# Altium PCB Smart_Watch.PcbDoc
Units mm, origin at the board's own origin, x right, y up, seen from the top; angles counter-clockwise.
Board outline 44 x 44 mm, 4 copper layers (Top Layer, Layer 1, Layer 2, Bottom Layer), stack 0.603 mm thick; 46 components, 48 nets, 221 pads, 80 vias.
Unrouted connection lines stored in the file: 80.
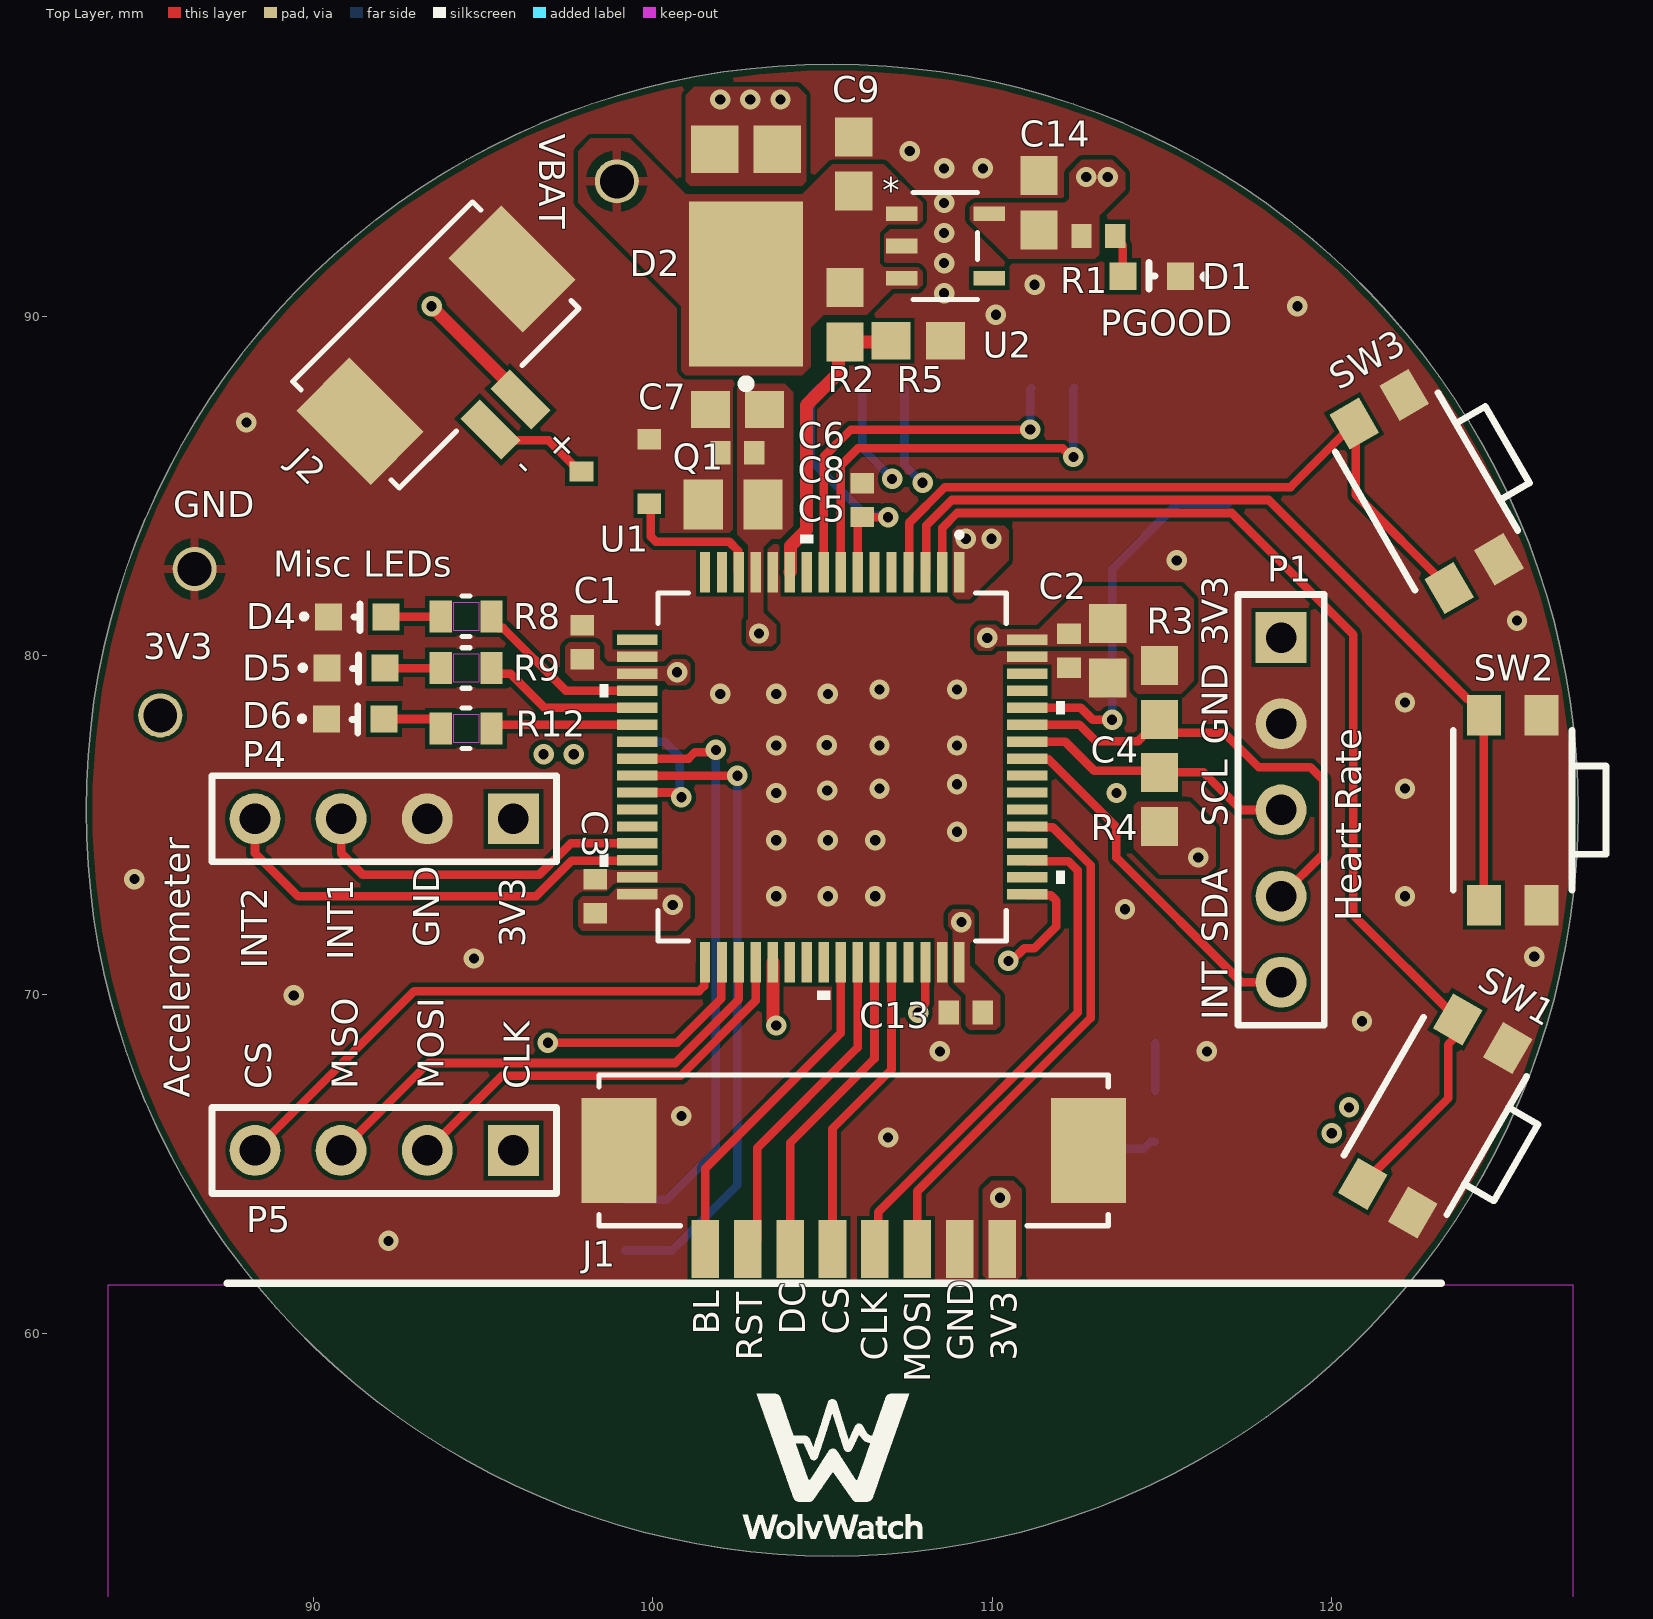
[diagram p0: Top Layer view]
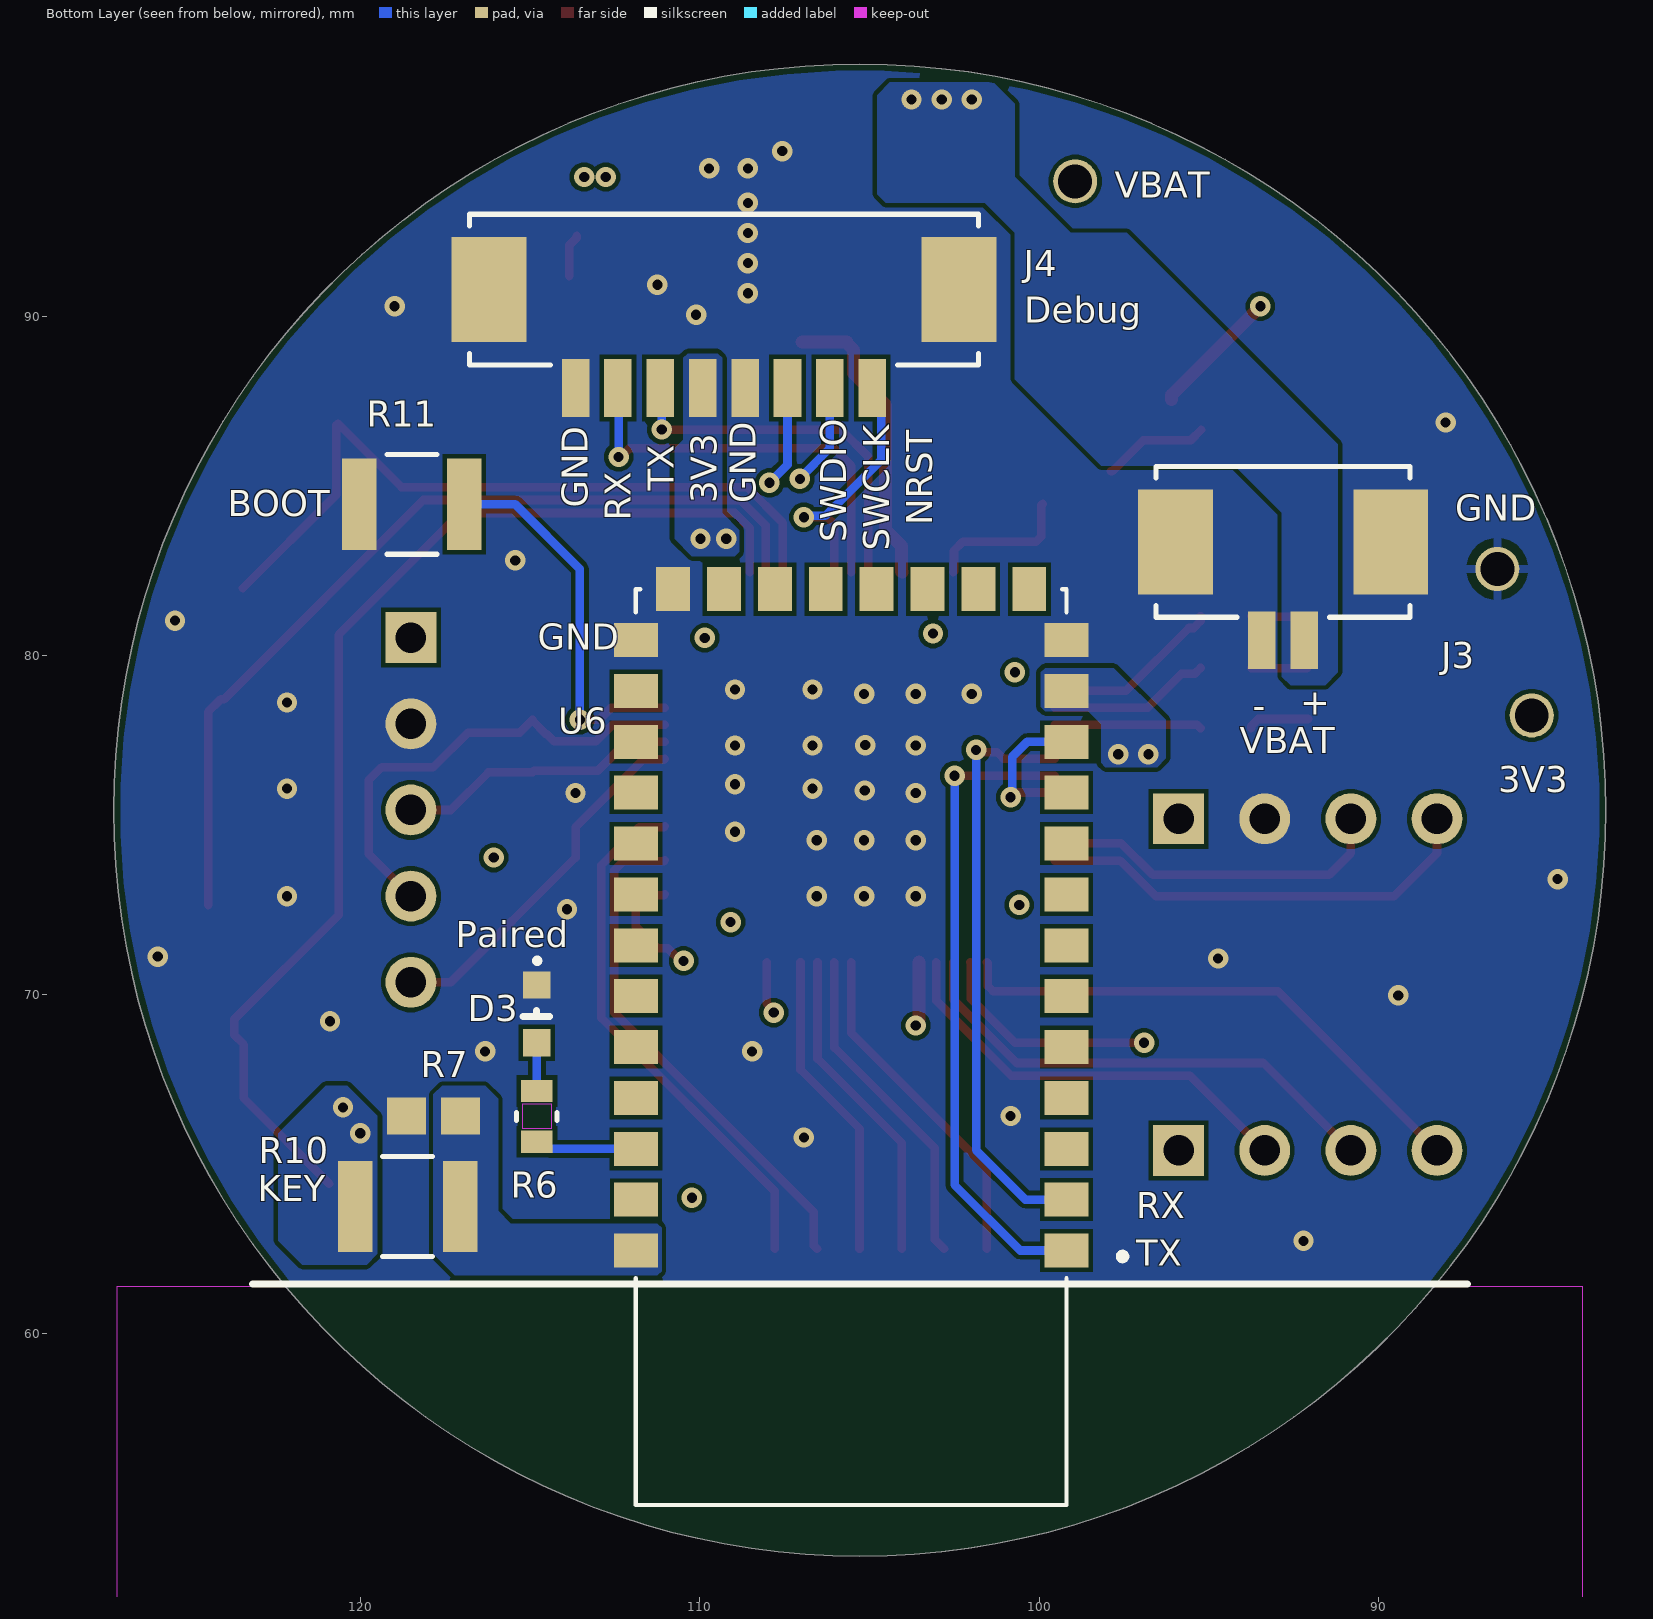
[diagram p1: Bottom Layer view, seen from below]
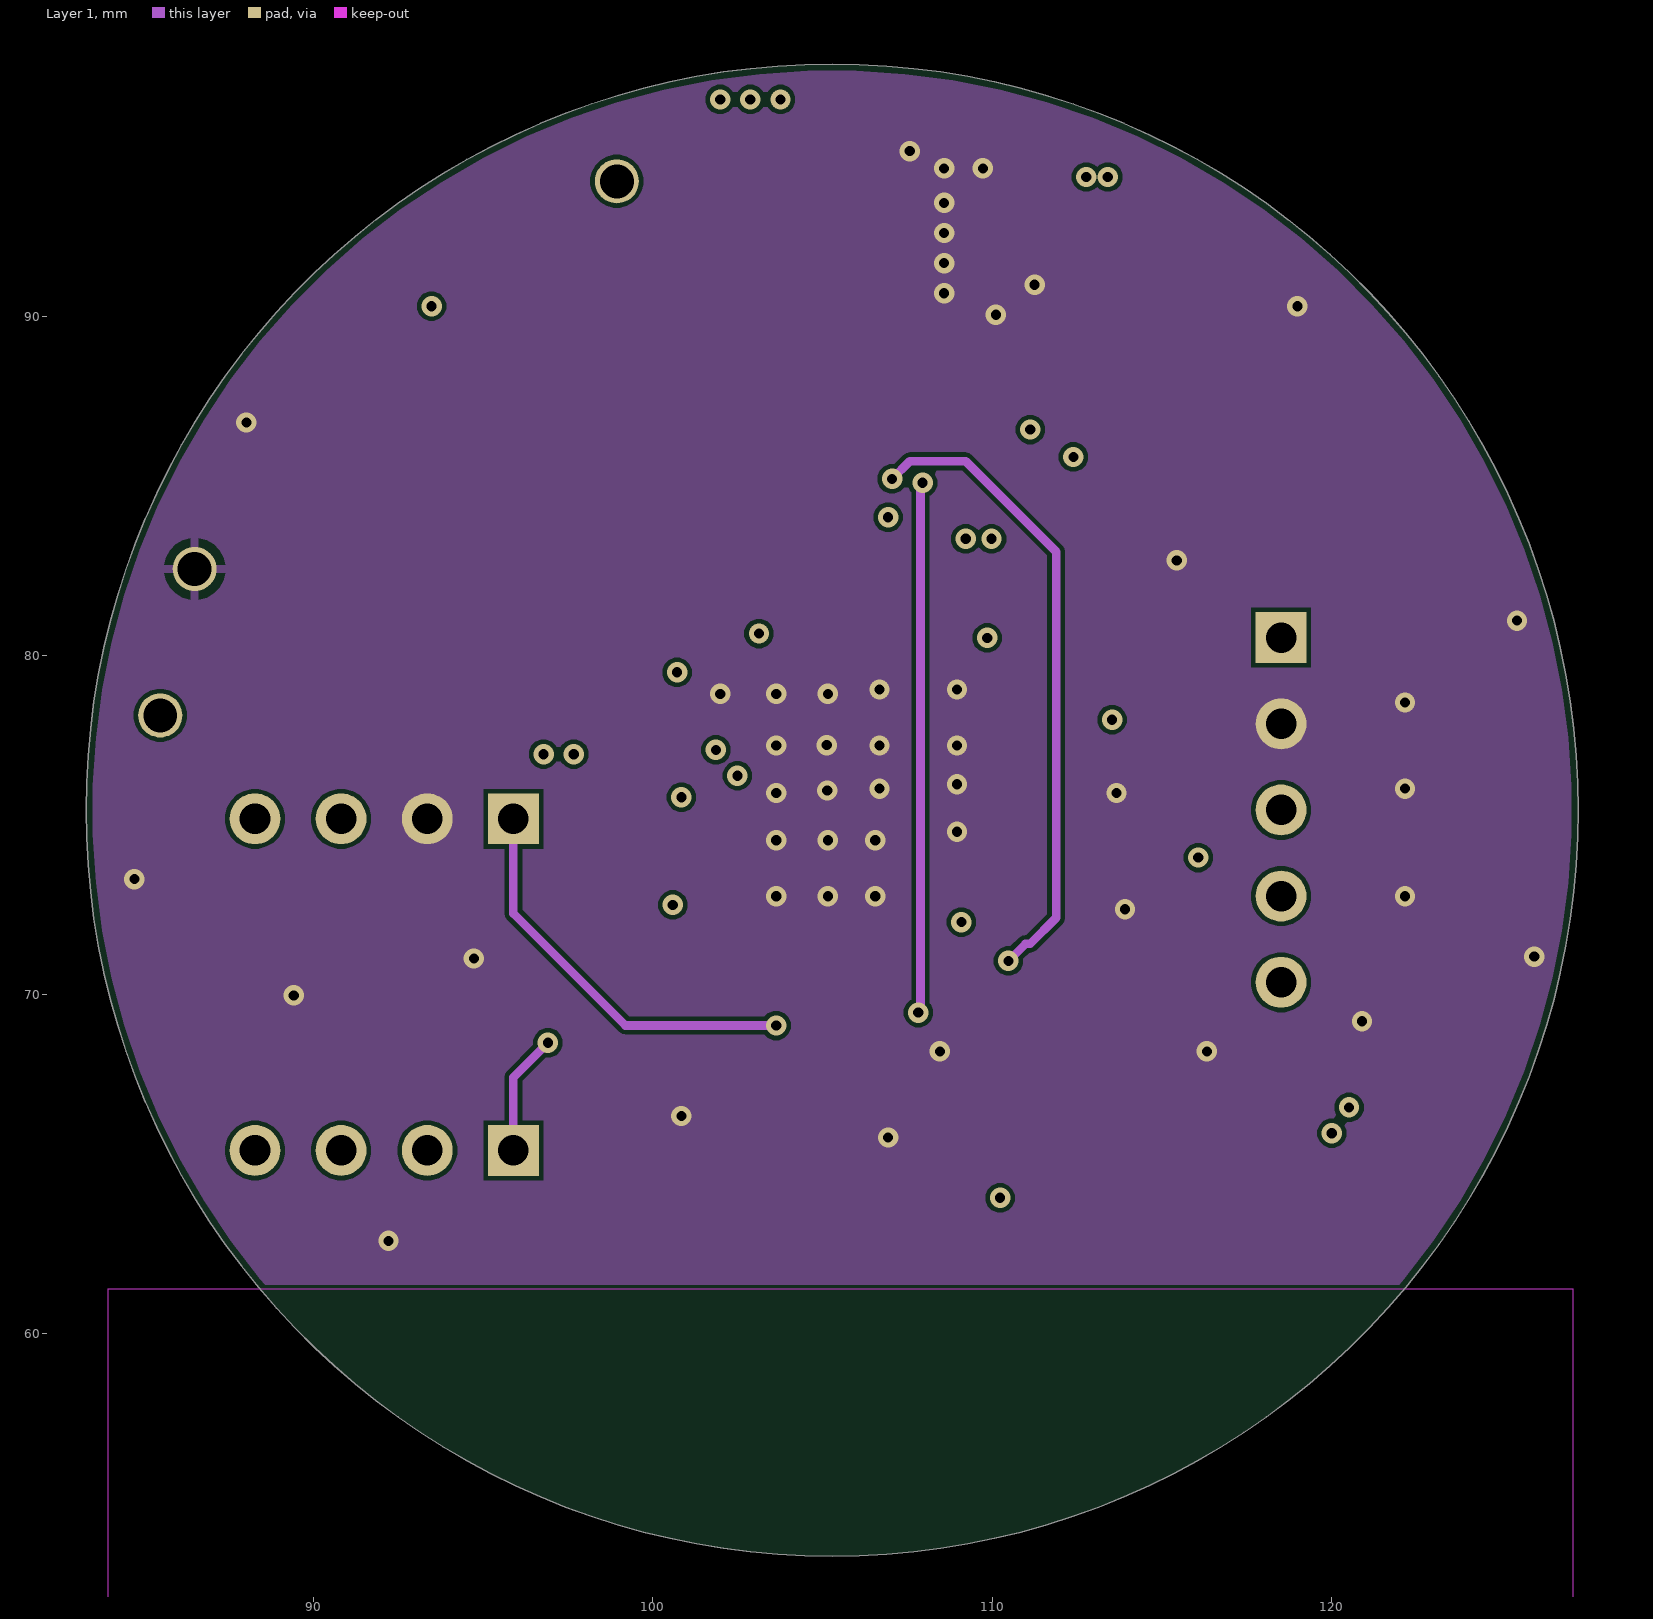
[diagram p2: Layer 1]
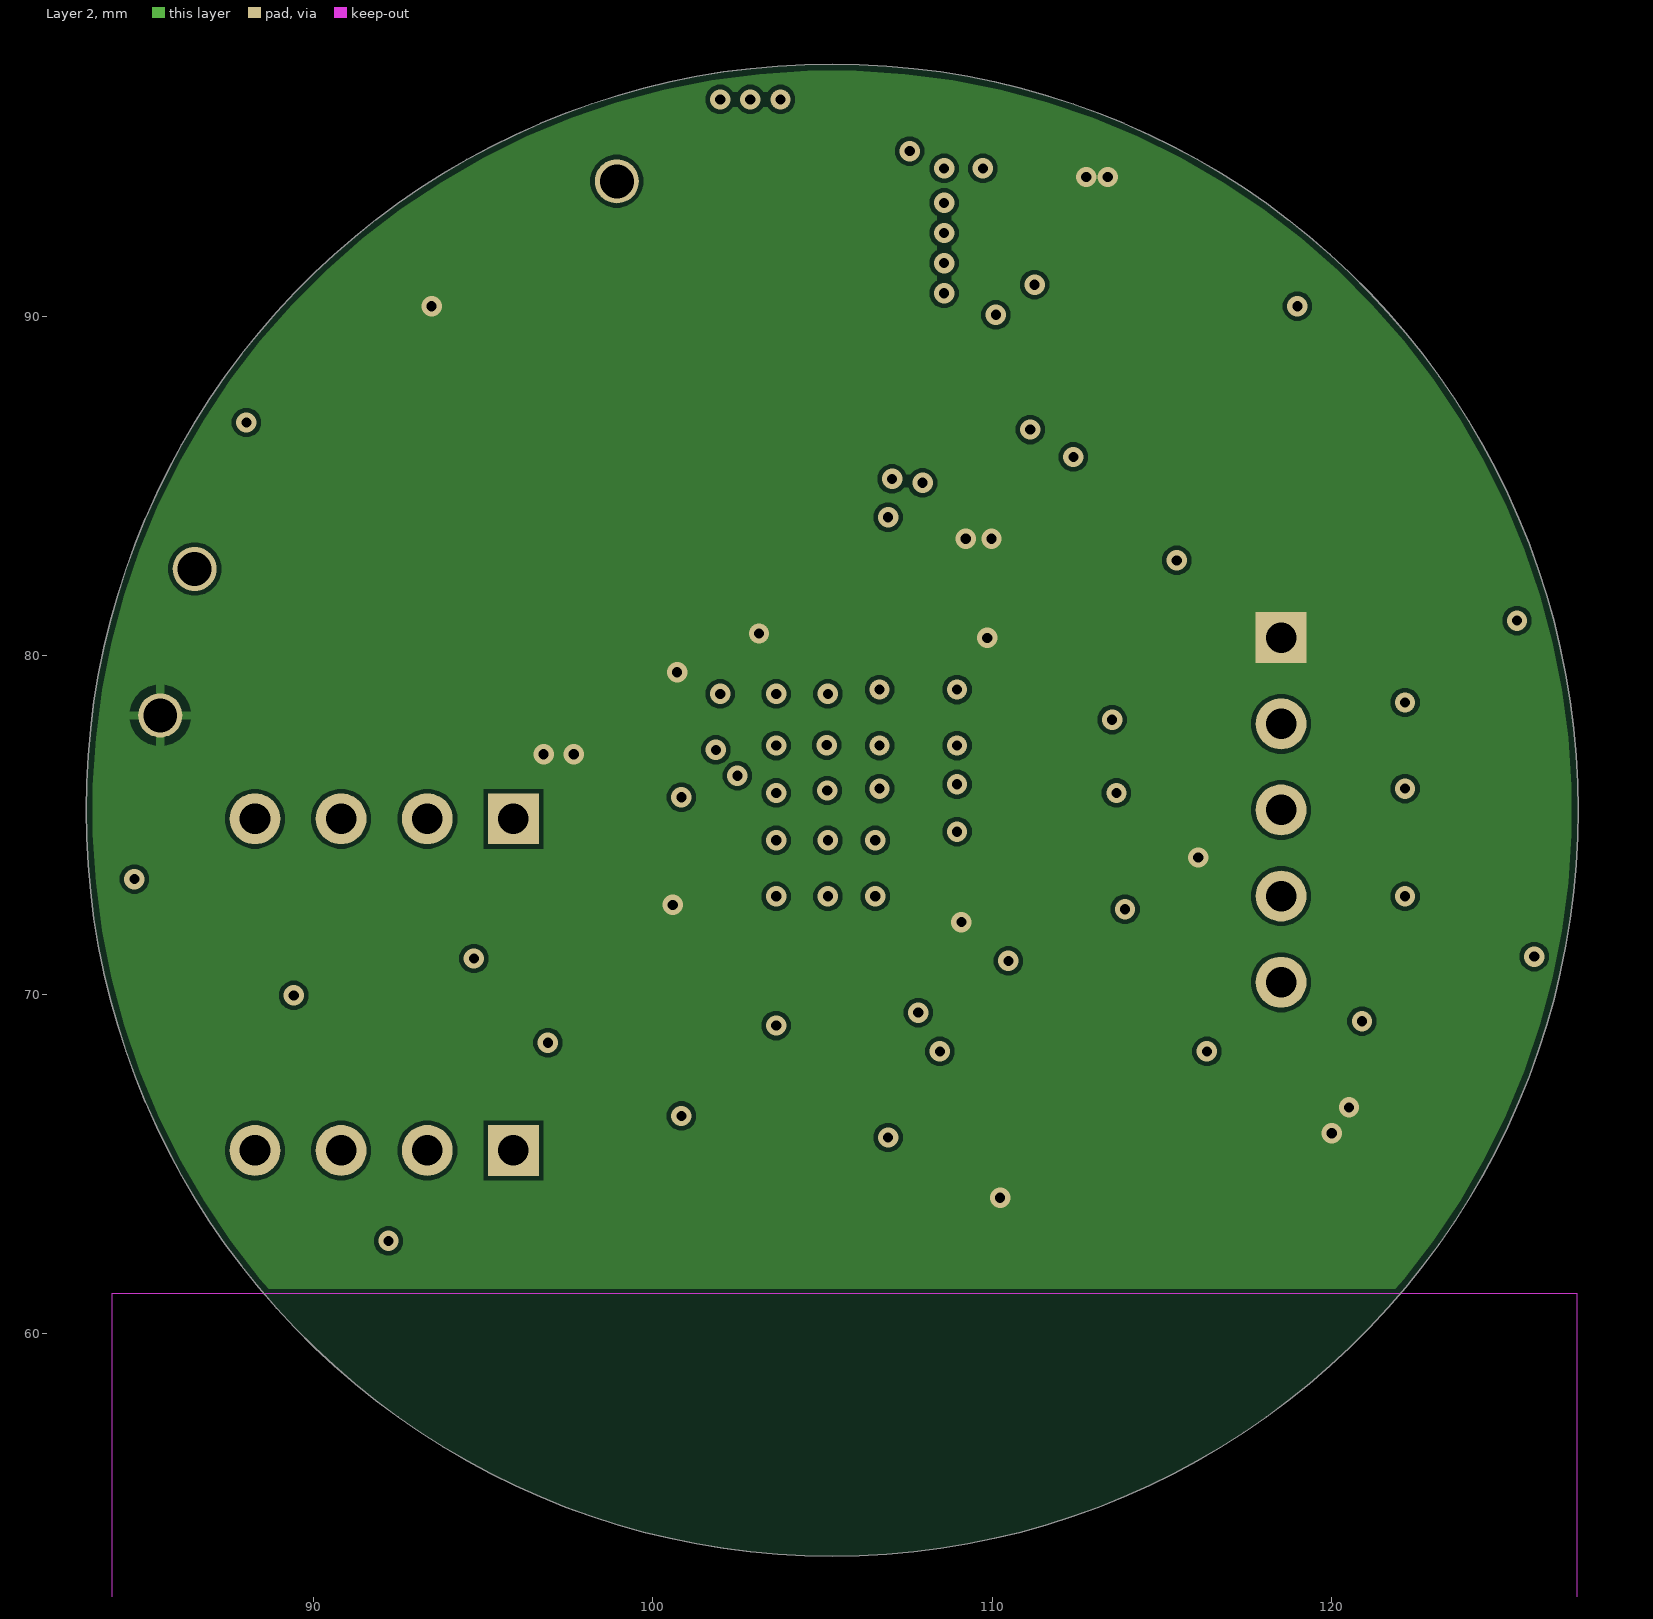
[diagram p3: Layer 2]

## Layer stack, top to bottom
Top Solder: solder mask 0.0102, Solder Resist, Dk 3.5
Top Layer: signal copper 0.0356
Dielectric 2: prepreg 0.0711, PP-006, Dk 4.1
Layer 1: signal copper 0.035
Dielectric 1: dielectric 0.32, FR-4, Dk 4.8
Layer 2: signal copper 0.035
Dielectric 3: prepreg 0.0711, PP-006, Dk 4.1
Bottom Layer: signal copper 0.0356
Bottom Solder: solder mask 0.0102, Solder Resist, Dk 3.5

## Board outline
83.283,75.438 ccw(c105.283,75.438) 105.283,53.438 ccw(c105.283,75.438) 127.283,75.438 ccw(c105.283,75.438) 105.283,97.438 ccw(c105.283,75.438)

## Design rules (kind name [scope] priority, off if disabled: settings)
BoardOutlineClearance [All] p1: gap=0.2 ignorepadtopadclearanceinfootprint=FALSE
Clearance [All] p1: gap=0.127 ignorepadtopadclearanceinfootprint=FALSE except(0.25: Arc-Hole Track-Hole SMDPad-Hole THPad-Hole Via-Hole Fill-Hole Poly-Hole Region-Hole Text-Hole)
ComponentClearance ComponentClearance_1 [All] p1: gap=0.254 collisioncheckmode=3 verticalgap=0.254 showdistances=FALSE
DiffPairsRouting [All] p1: maxlimit=0.254 minlimit=0.127 mostfreqgap=0.254 toplayer_prefgap=0.127 toplayer_minwidth=0.127 toplayer_maxwidth=25.4 toplayer_prefwidth=0.127 midlayer1_mingap=0.254 midlayer1_minwidth=0.381 midlayer1_maxwidth=0.381 midlayer1_prefwidth=0.381 midlayer2_mingap=0.254 midlayer2_minwidth=0.381 midlayer2_maxwidth=0.381 midlayer2_prefwidth=0.381 bottomlayer_prefgap=0.127 bottomlayer_minwidth=0.127 bottomlayer_maxwidth=25.4 bottomlayer_prefwidth=0.127 maxuncoupledlength=12.7
Height [All] p1: minheight=0 maxheight=1816.048 prefheight=12.7
HoleSize [All] p1: absolutevalues=TRUE maxlimit=6.3 minlimit=0.3 maxpercent=80.000 minpercent=20.000
HoleToHoleClearance [All] p1: gap=0.25 allowstackedmicrovias=FALSE
MatchedLengths SPI [InNetClass('SPI')] p1: tolerance=0 checknetsindiffpair=FALSE checkdiffpairvsdiffpair=TRUE checkxsignals=TRUE checkothers=TRUE
MinimumAnnularRing [All] p1: minimumring=0.076
MinimumSolderMaskSliver [All] p1: minsoldermaskwidth=0
PlaneClearance [All] p1: clearance=0.127
PlaneConnect PlaneConnectPowerPads [InPadClass('PowerPads')] p1: planeconnectstyle=Direct reliefexpansion=0.508 reliefentries=4 reliefconductorwidth=0.254 reliefairgap=0.254
PlaneConnect [All] p2: pad.planeconnectstyle=Relief pad.reliefexpansion=0.3 pad.reliefentries=4 pad.reliefconductorwidth=0.127 pad.reliefairgap=0.127 via.planeconnectstyle=Direct via.reliefexpansion=0.3 via.reliefentries=4 via.reliefconductorwidth=0.127 via.reliefairgap=0.127
PolygonConnect PolygonConnectPowerPads [All vs (InPadClass('PowerPads'))] p1: connectstyle=Direct reliefconductorwidth=0.254 reliefentries=4 polygonreliefangle="90 Angle" airgapwidth=0.254
PolygonConnect [All] p2: connectstyle=Direct reliefconductorwidth=0.127 reliefentries=4 polygonreliefangle="90 Angle" airgapwidth=0.127
RoutingVias [All] p1: holewidth=0.203 width=0.508 viastyle="Through Hole" minholewidth=0.3 minwidth=0.6 maxholewidth=0.6 maxwidth=6.6
SilkToSilkClearance [All] p1: silktosilkclearance=0
SilkToSolderMaskClearance [IsPad] p1: minsilkscreentomaskgap=0.127 clearancetoexposedcopper=TRUE
SolderMaskExpansion [All] p1: expansion=0.075 istentingtop=FALSE
SupplyNets "Schematic Supply Nets_2" [InNet('VBAT')] p1: voltage=0.000
SupplyNets "Schematic Supply Nets_5" [InNet('GND')] p2: voltage=0.000
SupplyNets "Schematic Supply Nets_1" [InNet('3.3V')] p3: voltage=0.000
SupplyNets "Schematic Supply Nets" [InNet('ACC_3.3V')] p4: voltage=0.000
Width [All] p1: maxlimit=25.4 minlimit=0.127 preferedwidth=0.254 midlayer1_maxwidth=0.254 midlayer2_maxwidth=0.254 minimp=50.000000 maximp=50.000000 favimp=50.000000
20 further rules are at their usual default settings.

## Classes and differential pairs
component class U_MCU: BTRX C1 C2 C3 C4 C5 C6 C7 C8 C13 D4 D5 D6 GND J4 R3 R4 R8 R11 R12 SW1 SW2 SW3 U1
component class U_LDOs: C9 C14 D1 R1 U2
component class U_Connectors: D2 D3 J1 J2 J3 P1 Q1 R2 R5 R6 R7 R10 U6
component class U_Accelerometer: P4 P5

## Components (designator, comment, footprint, x,y, rotation, side; value= is the part's Value field where it differs from the comment)
3V3 "5003" TEST-POINT-0001 85.471,78.232 r270 top (schematic designator TP2)
C1 "CC0402KRX7R7BB104" CAP-0402 97.917,80.391 r90 top
C2 "CC0402KRX7R7BB104" CAP-0402 112.268,80.137 r270 top
C3 "CC0402KRX7R7BB104" CAP-0402 98.298,72.898 r90 top
C4 "CC0603KRX5R8BB475" CAP-0603 113.411,80.137 r270 top
C5 "GRM2195C1H103JA01D" CAP-0805 102.362,84.455 r180 top
C6 "CC0402KRX7R7BB104" CAP-0402 102.489,85.979 r180 top
C7 "CC0603KRX7R7BB105" CAP-0603 102.489,87.249 r180 top
C8 "CC0402KRX7R7BB104" CAP-0402 106.172,84.582 r90 top
C9 "CC0603KRX7R7BB105" CAP-0603 105.918,94.488 r90 top
C13 "CC0402KRX7R7BB104" CAP-0402 109.22,69.469 r180 top
C14 "CC0603KRX7R7BB105" CAP-0603 111.379,93.345 r90 top
D1 "BL-HKC36G-AV-TRB" LED-0603 116.145,91.932 r180 top
D2 "PDS760-13" DO-POWERDI5 102.743,92.075 r270 top
D3 "BL-HKC36G-AV-TRB" LED-0603 115.559,70.871 r270 bottom
D4 "BL-HKC36G-AV-TRB" LED-0603 89.84,80.387 r0 top
D5 "BL-HKC36G-AV-TRB" LED-0603 89.802,78.876 r0 top
D6 "BL-HKC36G-AV-TRB" LED-0603 89.779,77.374 r0 top
GND "5003" TEST-POINT-0001 86.487,82.55 r90 top (schematic designator TP4)
J1 "532610871" CONN_532610001-SD_08_MOL 105.918,65.405 r0 top
J2 "532610271" CONN_532610001-SD_02_MOL 93.599,89.154 r45 top
J3 "532610271" CONN_532610001-SD_02_MOL 92.803,83.35 r180 bottom
J4 "532610871" CONN_532610001-SD_08_MOL 109.29,90.789 r180 bottom
P1 "Header 5" HDR1X5 118.52,80.524 r270 top
P4 "Header 4" HDR1X4 95.885,75.184 r180 top
P5 "Header 4" HDR1X4 95.885,65.405 r180 top
Q1 "T2N7002AK,LM" IC-SOT23-3 98.889,85.425 r90 top
R1 "RC0402FR-07100RL" RES-0402 113.133,92.368 r0 top
R2 "RC0603FR-07100KL" RES-0603 105.664,90.043 r90 top
R3 "RC0603FR-074K7L" RES-0603 114.935,78.905 r90 top
R4 "RC0603FR-074K7L" RES-0603 114.935,75.751 r270 top
R5 "RC0603FR-07200KL" RES-0603 107.823,89.281 r180 top
R6 "ERJP03F4700V" RES_ERJP03_PAN 114.808,66.408 r270 bottom
R7 "RC0603FR-0710KP" RES-0603 117.856,66.421 r180 bottom
R8 "ERJP03F4700V" RES_ERJP03_PAN 94.488,81.153 r180 top
R9 "ERJP03F4700V" RES_ERJP03_PAN 94.488,79.629 r180 top
R10 "CRCW12100000Z0EA" RES_CRCW_1210_VIS 118.618,63.754 r180 bottom
R11 "CRCW12100000Z0EA" RES_CRCW_1210_VIS 118.491,84.455 r180 bottom
R12 "ERJP03F4700V" RES_ERJP03_PAN 94.488,77.851 r180 top
SW1 "434351045816" 434351045816 123.063,66.421 r60 top
SW2 "434351045816" 434351045816 125.349,75.438 r90 top
SW3 "434351045816" 434351045816 122.809,84.836 r120 top
U1 "STM32L496RGT6" LQFP64-10X10MM_STM 105.283,76.708 r270 top locked
U2 "XC6210B332MR-G" SOT-25_TOR 108.62,92.074 r0 top
U6 "HC-05" XCVR_HC-05 105.537,68.778 r0 bottom locked
VBAT "5003" TEST-POINT-0001 98.933,93.98 r0 top (schematic designator TP1)

## Footprints (in the part's own frame and the unit in brackets; to place one, negate y for a bottom-side part, rotate by r counter-clockwise, add the part's x,y. Pads: shape width x height; smd on the part's side, far side on the other; paste and mask are expansions set on the pad)
434351045816 [mm] "3.5x4.7 mm SMD side push"
  rect 1.2x1 smd: A1(-2.8,0.85) A2(2.8,0.85) B1(-2.8,-0.85) B2(2.8,-0.85)
  silkscreen extent -2.35,-2.75 2.35,1.75, body extent -3.2,-2.75 3.2,1.75, height 1.65
CAP-0402 [mm]
  rect 0.6x0.7 smd: 1(-0.5,0) 2(0.5,0)
  body extent -0.5,-0.22 0.5,0.23, height 0.5
CAP-0603 [mm]
  rect 1.15x1.1 smd: 1(-0.8,0) 2(0.8,0)
  body extent -0.8,-0.45 0.8,0.45, height 0.8
CAP-0805 [mm]
  rect 1.16x1.47 smd: 1(-0.88,0) 2(0.88,0)
  body extent -1,-0.63 1,0.63, height 0.94
CONN_532610001-SD_02_MOL [mil]
  rect 32x67 smd paste+0 mask+0: 1(24.61,-114.35) 2(-24.61,-114.35)
  rect 87x122 smd paste-61 mask-61: 3(-125,-0.18) 4(125,-0.18)
  silkscreen extent -147,-88 147,88, body extent -150,-132 151,72, height 126
CONN_532610001-SD_08_MOL [mil]
  rect 32x67 smd paste+0 mask+0: 1(172.24,-114.35) 2(123.03,-114.35) 3(73.82,-114.35) 4(24.61,-114.35) 5(-24.61,-114.35) 6(-73.82,-114.35) 7(-123.03,-114.35) 8(-172.24,-114.35)
  rect 87x122 smd paste-61 mask-61: 9(-272.64,-0.18) 10(272.64,-0.18)
  silkscreen extent -296,-88 296,88, body extent -300,-129 297,76, height 126
DO-POWERDI5 [mm] "SMD, 3-Leads, Body 3.975x5.375mm, Pitch 1.84mm"
  rect 1.4x1.39 smd: 1(-2.856,-0.92) 1(-2.856,0.92)
  rect 4.86x3.36 smd: 2(1.126,0)
  silkscreen extent 3.94,-0.12 4.19,0.13, body extent -3.25,-1.98 3.25,1.98, height 1.15
HDR1X4 [mm] "Connector; Header; 4 Position"
  rect 1.5x1.5 hole 0.9: 1(0,0)
  round 1.5 hole 0.9: 2(2.54,0) 3(5.08,0) 4(7.62,0)
  silkscreen extent -1.27,-1.27 8.89,1.27
HDR1X5 [mm] "Connector; Header; 5 Position"
  rect 1.5x1.5 hole 0.9: 1(0,0)
  round 1.5 hole 0.9: 2(2.54,0) 3(5.08,0) 4(7.62,0) 5(10.16,0)
  silkscreen extent -1.27,-1.27 11.43,1.27
IC-SOT23-3 [mm]
  rect 0.6x0.7 smd: 1(-0.95,-1) 2(0.95,-1) 3(0,1)
  body extent -1.46,-1.18 1.46,1.19, height 1.12
LED-0603 [mm]
  rect 0.8x0.8 smd: 1(2.291,0.751) 2(0.589,0.751)
  silkscreen extent -0.2,0.34 1.52,1.13, body extent 0.65,0.36 2.25,1.16, height 0.39
LQFP64-10X10MM_STM [mm]
  rect 1.194x0.305 smd paste+0 mask+0: 1(-5.75,3.75) 2(-5.75,3.25) 3(-5.75,2.75) 4(-5.75,2.25) 5(-5.75,1.75) 6(-5.75,1.25) 7(-5.75,0.75) 8(-5.75,0.25) 9(-5.75,-0.25) 10(-5.75,-0.75) 11(-5.75,-1.25) 12(-5.75,-1.75) 13(-5.75,-2.25) 14(-5.75,-2.75) 15(-5.75,-3.25) 16(-5.75,-3.75) 33(5.75,-3.75) 34(5.75,-3.25) 35(5.75,-2.75) 36(5.75,-2.25) 37(5.75,-1.75) 38(5.75,-1.25) 39(5.75,-0.75) 40(5.75,-0.25) 41(5.75,0.25) 42(5.75,0.75) 43(5.75,1.25) 44(5.75,1.75) 45(5.75,2.25) 46(5.75,2.75) 47(5.75,3.25) 48(5.75,3.75)
  rect 0.305x1.194 smd paste+0 mask+0: 17(-3.75,-5.75) 18(-3.25,-5.75) 19(-2.75,-5.75) 20(-2.25,-5.75) 21(-1.75,-5.75) 22(-1.25,-5.75) 23(-0.75,-5.75) 24(-0.25,-5.75) 25(0.25,-5.75) 26(0.75,-5.75) 27(1.25,-5.75) 28(1.75,-5.75) 29(2.25,-5.75) 30(2.75,-5.75) 31(3.25,-5.75) 32(3.75,-5.75) 49(3.75,5.75) 50(3.25,5.75) 51(2.75,5.75) 52(2.25,5.75) 53(1.75,5.75) 54(1.25,5.75) 55(0.75,5.75) 56(0.25,5.75) 57(-0.25,5.75) 58(-0.75,5.75) 59(-1.25,5.75) 60(-1.75,5.75) 61(-2.25,5.75) 62(-2.75,5.75) 63(-3.25,5.75) 64(-3.75,5.75)
  silkscreen extent -6.93,-6.85 6.85,6.85, body extent -6,-6 6,6, height 1.6
RES-0402 [mm]
  rect 0.6x0.7 smd: 1(-0.5,0) 2(0.5,0)
  body extent -0.5,-0.25 0.5,0.25, height 0.3
RES-0603 [mm]
  rect 1.15x1.1 smd: 1(-0.8,0) 2(0.8,0)
  body extent -0.8,-0.4 0.8,0.4, height 0.43
RES_CRCW_1210_VIS [mil]
  rect 40x106 smd paste+0 mask+0: 1(-61,0) 2(61,0)
  silkscreen extent -29,-58 29,58, body extent -67,-53 67,53, height 24
RES_ERJP03_PAN [mil]
  rect 26x37 smd paste+0 mask+0: 1(-29.5,0) 2(29.5,0)
  Top Layer keep-out region: -14.5,-16.5 -14.5,16.5 14.5,16.5 14.5,-16.5
  silkscreen extent -4,-24 4,24, body extent -34,-19 34,19, height 22
SOT-25_TOR [mil]
  rect 36.5x17 smd paste+0 mask+0: 1(-50.75,37.4) 2(-50.75,0) 3(-50.75,-37.4) 4(50.75,-37.4) 5(50.75,37.4)
  silkscreen extent -38,-62 38,62, body extent -55,-57 55,57, height 51
TEST-POINT-0001 [mm] "2024 miniature test point"
  round 1.3 hole 1: 1(0,0)
  body extent -1.27,-1.27 1.27,1.27, height 4.57
XCVR_HC-05 [mm]
  rect 1.3x1 smd: 1(-6.35,6.325) 2(-6.35,4.825) 3(-6.35,3.325) 4(-6.35,1.825) 5(-6.35,0.325) 6(-6.35,-1.175) 7(-6.35,-2.675) 8(-6.35,-4.175) 9(-6.35,-5.675) 10(-6.35,-7.175) 11(-6.35,-8.675) 12(-6.35,-10.175) 13(-6.35,-11.675) 22(6.35,-11.675) 23(6.35,-10.175) 24(6.35,-8.675) 25(6.35,-7.175) 26(6.35,-5.675) 27(6.35,-4.175) 28(6.35,-2.675) 29(6.35,-1.175) 30(6.35,0.325) 31(6.35,1.825) 32(6.35,3.325) 33(6.35,4.825) 34(6.35,6.325)
  rect 1x1.3 smd: 14(-5.25,-13.175) 15(-3.75,-13.175) 16(-2.25,-13.175) 17(-0.75,-13.175) 18(0.75,-13.175) 19(2.25,-13.175) 20(3.75,-13.175) 21(5.25,-13.175)
  silkscreen extent -8.1,-13.18 6.35,13.82, body extent -6.5,-13.45 6.5,13.45, height 2.2

## Part data
3V3 GND VBAT: library part TEST-POINT-0001, "Oranange PC Test Point, Miniature Phoisphor Bronze Silver Plating Through Hole Mounting Type"
C1 C2 C3 C6 C8 C13: library part CAP-0.1U-0001, "CAP CER 0.1UF 16V X7R 0402", Capacitance="100 nF", Voltage Rating="16 V", ComponentLink2Description=Datasheet, ComponentLink2URL=https://www.yageo.com/upload/media/product/productsearch/datasheet/mlcc/UPY-GPHC_X7R_6.3V-to-250V_24.pdf, Device Class=Ceramic, Size=0402
C4: library part CAP-4.7U-0001, "CAP CER 4.7UF 25V X5R 0603", Capacitance="4.7 uF", Voltage=25V, Device Class=Ceramic, Size=0603
C5: library part CAP-10N-0001, "CAP CER 10000PF 50V C0G/NP0 0805", Capacitance=10nF, Voltage=50V, ComponentLink1Description=Datasheet, ComponentLink1URL=https://search.murata.co.jp/Ceramy/image/img/A01X/G101/ENG/GRM2195C1H103JA01-01.pdf, Device Class=Ceramic, Size=0805
C7 C9 C14: library part CAP-1U-0002, "CAP CER 1UF 16V X7R 0603", Capacitance="1.0 uF", Voltage=16V, Device Class=Ceramic, Size=0603
D1 D3 D4 D5 D6: library part LED-0001, "LED YELLOW CLEAR 0603 SMD", Forward Current=30mA, Forward Voltage=2V, ComponentLink1Description=Datasheet, ComponentLink1URL=https://www.americanbrightled.com/pdffiles/led-components/smt/BL-HKC36G-AV-TRB.pdf
D2: library part DIO-SCHOTTKY-0001, "DIODE SCHOTTKY 60V 7A POWERDI5", Forward Current=7A, Reverse Voltage (DC)=60V, ComponentLink1Description=Datasheet, ComponentLink1URL=https://www.diodes.com/assets/Datasheets/PDS760.pdf
J1 J4: library part Header-PICO-8, "No Description Available", Mfr_Name="Molex Connector Corporation", ComponentLink1Description=Datasheet, ComponentLink1URL=https://www.molex.com/content/dam/molex/molex-dot-com/products/automated/en-us/salesdrawingpdf/532/53261/532610871_sd.pdf?inline, RefDes=RefDes, Type=Type
J2 J3: library part Header-PICO-2, "No Description Available", Mfr_Name="Molex Connector Corporation", ComponentLink1Description=Datasheet, ComponentLink1URL=https://www.molex.com/content/dam/molex/molex-dot-com/products/automated/en-us/salesdrawingpdf/532/53261/532610271_sd.pdf?inline, RefDes=RefDes, Type=Type
P1: "Header, 5-Pin", LatestRevisionDate=17-Jul-2002, LatestRevisionNote="Re-released for DXP Platform.", Publisher="Altium Limited"
P4 P5: "Header, 4-Pin", LatestRevisionDate=17-Jul-2002, LatestRevisionNote="Re-released for DXP Platform.", Publisher="Altium Limited"
Q1: library part NMOS-200MA-0001, "MOSFET N-CH 60V 200MA SOT23", Continuous Current=200mA, Voltage=60V, ComponentLink1Description=Datasheet, ComponentLink1URL=https://toshiba.semicon-storage.com/info/T2N7002AK_datasheet_en_20150401.pdf?did=29712&prodName=T2N7002AK
R1: library part RES-100-0001, "RES 100 OHM 1% 1/16W 0402", Power=1/16W, Resistance=100R, Tolerance=1%, ComponentLink1Description=Datasheet, ComponentLink1URL=https://www.yageo.com/upload/media/product/products/datasheet/rchip/PYu-RC_Group_51_RoHS_L_12.pdf, Size=0402
R2: library part RES-100k-0001, "RES SMD 100K OHM 1% 1/10W 0603", Power=100mW, Resistance=100k, Tolerance=1%, ComponentLink1Description=Datasheet, ComponentLink1URL=https://www.yageo.com/upload/media/product/products/datasheet/rchip/PYu-RC_Group_51_RoHS_L_12.pdf, Size=0603
R3 R4: library part RES-4.7k-0001, "RES 4.7K OHM 1% 1/10W 0603", Power=1/10W, Resistance=4.7k, Tolerance=1%, ComponentLink1Description=Datasheet, ComponentLink1URL=https://www.yageo.com/upload/media/product/products/datasheet/rchip/PYu-RC_Group_51_RoHS_L_12.pdf, Size=0603
R5: library part RES-200k-0001, "RES SMD 200K OHM 1% 1/10W 0603", Power=100mW, Resistance=200k, Tolerance=1%, ComponentLink1Description=Datasheet, ComponentLink1URL=https://www.yageo.com/upload/media/product/products/datasheet/rchip/PYu-RC_Group_51_RoHS_L_12.pdf, Size=0603
R6 R8 R9 R12: library part RES-470-0603, "470 Ohms ±1% 0.2W, 1/5W Chip Resistor 0603 (1608 Metric) Automotive AEC-Q200, Pulse Withstanding Thick Film", Mfr_Name=Panasonic, ComponentLink1Description=Datasheet, ComponentLink1URL=https://industrial.panasonic.com/cdbs/www-data/pdf/RDO0000/AOA0000C331.pdf
R7: library part RES-10K-0002, "RES SMD 10K OHM 1% 1/10W 0603", Manufacturer=YAGEO, Package Size=0603, Power Rating=1/10W, Resistance="10kOhm +/-1%", assembled?=no, Manufacturer Part Number=RC0603FR-0710KP
R10 R11: library part RES-0-1, "No Description Available", Mfr_Name=Vishay, ComponentLink1Description=Datasheet, ComponentLink1URL=https://www.vishay.com/docs/20035/dcrcwe3.pdf
SW1 SW2 SW3: library part Button-NO-90_1, "WS-TASU SMT Tact Switch 4.7x3.5mm side push, SPST-NO, 12VDC, 50mA, 160g", Manufacturer="Wurth Elektronik", Operating Temperature Max=85°C, Operating Temperature Min=-40°C, Rated Current=50mA, Rated Voltage=12VDC, Category="Tact Switches", Circuit=SPST-NO, ComponentLink1Description="Website Link", ComponentLink1URL=https://www.we-online.com/redexpert/article/434351045816?ad, ComponentLink2Description="Datasheet Link", ComponentLink2URL=https://www.we-online.com/redexpert/spec/434351045816?ad, Contact Material="Stainless Steel", Contact Plating=Silver, Height=1.65mm, Length=4.7mm, Manufacturer Part Number=434351045816, Match Code=WS-TASU, Mount="Surface Mount", Operation Force=160g, Packaging="Tape and Reel", Terminal Material="Copper Alloy", Terminal Plating=Silver, Washable=No, Width=3.5mm
U1: "ARM® Cortex®-M4 STM32L4 Microcontroller IC 32-Bit Single-Core 80MHz 1MB (1M x 8) FLASH 64-LQFP (10x10)", Mfr_Name=STMicroelectronics, ComponentLink1Description=Datasheet, ComponentLink1URL=https://www.st.com/resource/en/datasheet/stm32l496ae.pdf, RefDes=RefDes, Type=Type
U2: library part LDO-3.3V_1, "Linear Voltage Regulator IC Positive Fixed 1 Output 700mA SOT-25-5", Mfr_Name="Torex Semiconductor", ComponentLink1Description=Datasheet, ComponentLink1URL=https://product.torexsemi.com/system/files/series/xc6210.pdf, RefDes=RefDes, Type=Type
U6: "Bluetooth to Serial Port Module", Package="Module ITead Studio", Check_prices=https://www.snapeda.com/parts/HC-05/ITEAD/view-part/?ref=eda, ComponentLink1Description=Datasheet, ComponentLink1URL=https://components101.com/sites/default/files/component_datasheet/HC06%20Bluetooth%20Module%20Datasheet.pdf, ComponentLink2Description=Datasheet2, ComponentLink2URL=https://dcc-ex.com/reference/hardware/bluetooth/hc-05-06.html#gsc.tab=0, MF="ITead Studio", MP=HC-05, SnapEDA_Link=https://www.snapeda.com/parts/HC-05/ITEAD/view-part/?ref=snap

## Via types
v1: diameter 0.6, hole 0.3, Top Layer to Bottom Layer, 45 vias
v2: diameter 0.6, hole 0.3, Top Layer to Bottom Layer, tented bottom, 33 vias
v3: diameter 0.6, hole 0.3, Top Layer to Bottom Layer, tented both sides, 2 vias

## Nets (pads, with @x,y where several pads share a name; then routed paths per layer and width w, separated by ;. In a path a pad name is that pad's centre, name@x,y a point inside that pad or via, vN(x,y) a via of type N, cw(c..) or ccw(c..) an arc to the next point about the centre after c; other vN are vias at no path point)
3.3V: 3V3.1 C1.1 C2.1 C3.1 C4.1 C5.1 C6.1 C7.1 C13.1 C14.1 J1.1 J2.1 J4.5 P1.1 R1.1 R3.2 R4.2 R10.1 U1.1 U1.13 U1.19 U1.32 U1.48 U1.64 U2.5 U6.12 | length 3.8
  Top Layer w0.381: v1(93.472,90.297) 96.095,87.674 J2.1
  other v1: 120.015,65.913 120.523,66.675 116.078,74.041 96.774,77.089 97.663,77.089 109.22,83.439 109.982,83.439 112.776,94.107 113.411,94.107
  other v2: 110.236,64.008 109.093,72.136 100.584,72.644 100.711,79.502 109.855,80.518 103.124,80.645
ACC_3.3V: P4.1 U1.37 | length 13.8
  Top Layer w0.381: U1.37 103.533,69.256 103.632,69.157 v2(103.632,69.088)
  Layer 1 w0.254: P4.1 95.885,72.39 99.187,69.088 v2(103.632,69.088)
ACC_INT1: P4.3 U1.29 | length 10.4
  Top Layer w0.254: P4.3 90.805,74.168 91.44,73.533 96.647,73.533 97.572,74.458 U1.29
ACC_INT2: P4.4 U1.30 | length 13.2
  Top Layer w0.254: P4.4 88.265,74.168 89.535,72.898 96.551,72.898 97.605,73.952 99.527,73.952 U1.30
ADC: R2.1 R5.2 U1.11 | length 8.9
  Top Layer w0.254: R5.2@106.985,89.243 R5.2
  Top Layer w0.381: U1.11 104.05,82.475 104.05,83.222 104.521,83.693 104.521,87.376 105.465,88.32 105.465,89.007 R2.1@105.701,89.243 ; R2.1 R5.2@106.985,89.243
BL_Screen: J1.8 U1.41 | length 10.1
  Top Layer w0.254: J1.8 101.543,64.874 105.533,68.864 U1.41
BOOT: R11.2 U1.60 | length 11.3
  Top Layer w0.254: U1.60 112.612,78.458 112.965,78.105 v1(113.538,78.105)
  Bottom Layer w0.254: v1(113.538,78.105) 113.538,82.55 115.443,84.455 R11.2
BT_LED: U6.31
BT_RST: U1.26 U6.11 | length 4.4
  Top Layer w0.254: U1.26 100.63,75.958 100.769,75.819 v3(100.838,75.819)
  Bottom Layer w0.254: U6.11 100.347,77.453 100.789,77.011 100.789,75.868 v3(100.838,75.819)
BT_RX: U1.24 U6.2 | length 17.5
  Top Layer w0.254: U1.24 101.046,76.958 101.238,77.15 101.788,77.15 v2(101.854,77.216)
  Bottom Layer w0.254: U6.2 100.402,63.953 101.854,65.405 v2(101.854,77.216)
BT_TX: U1.25 U6.1 | length 19.1
  Top Layer w0.254: U1.25 99.535,76.456 102.487,76.456 v3(102.489,76.454)
  Bottom Layer w0.254: U6.1 100.553,62.453 102.489,64.389 v3(102.489,76.454)
BTN1_INT: SW1.A1 SW1.A2 U1.2 | length 33.7
  Top Layer w0.254: U1.2 108.533,83.768 108.966,84.201 117.063,84.201 120.65,80.614 120.65,72.348 SW1.A2 123.727,68.809 123.444,68.526 123.444,66.938 SW1.A1
BTN2_INT: SW2.A1 SW2.A2 U1.3 | length 26.4
  Top Layer w0.254: U1.3 108.058,82.483 108.058,83.832 108.808,84.582 118.155,84.582 124.026,78.711 124.126,78.711 124.499,78.338 SW2.A2 SW2.A1
BTN3_INT: SW3.A1 SW3.A2 U1.4 | length 21.8
  Top Layer w0.254: U1.4 107.558,82.483 107.558,83.915 108.606,84.963 118.8,84.963 SW3.A2 120.723,86.786 120.723,84.736 SW3.A1
CS_ACC: P5.4 U1.33 | length 16
  Top Layer w0.254: P5.4 92.964,70.104 101.359,70.104 101.508,70.253 101.508,70.933 U1.33
CS_Screen: J1.5 U1.44 | length 9.2
  Top Layer w0.254: J1.5 105.293,66.05 107.033,67.79 U1.44
DC_Screen: J1.6 U1.43 | length 9.5
  Top Layer w0.254: J1.6 104.043,65.624 106.533,68.114 U1.43
GND: C1.2 C2.2 C3.2 C4.2 C5.2 C6.2 C7.2 C8.2 C9.2 C13.2 C14.2 D1.2 D3.2 D4.2 D5.2 D6.2 GND.1 J1.2 J1.9 J1.10 J2.3 J2.4 J3.2 J3.3 J3.4 J4.4 J4.8 J4.9 J4.10 P1.2 P4.2 Q1.2 R5.1 R7.1 R11.1 SW1.B1 SW1.B2 SW2.B1 SW2.B2 SW3.B1 SW3.B2 U1.12 U1.18 U1.31 U1.47 U1.63 U2.2 U6.13 U6.21 U6.22
  other v1: 92.202,62.738 116.332,68.326 120.904,69.215 89.408,69.977 94.719,71.064 125.984,71.12 113.919,72.517 122.174,72.898 84.709,73.406 113.665,75.946 122.174,76.073 122.174,78.613 125.476,81.026 115.443,82.804 88.011,86.868 110.109,90.043 118.999,90.297 108.585,90.678 111.252,90.932 108.585,91.567 108.585,92.456 108.585,93.345 108.585,94.361 109.728,94.361 107.569,94.869
  other v2: 106.934,65.786 100.838,66.421 108.458,68.326 103.632,72.898 105.156,72.898 106.553,72.898 103.632,74.549 105.156,74.549 106.553,74.549 108.966,74.803 103.632,75.946 105.138,76.018 106.68,76.073 108.966,76.2 103.632,77.343 105.121,77.355 106.68,77.343 108.966,77.343 101.981,78.867 103.632,78.867 105.156,78.867 106.68,78.994 108.966,78.994
Haptic: Q1.1 U1.14 | length 4.4
  Top Layer w0.254: Q1.1 99.939,84.425 99.939,83.502 100.088,83.353 102.246,83.353 102.508,83.092 102.508,82.483 U1.14
Haptic-: J2.2 Q1.3 | length 3.2
  Top Layer w0.254: J2.2 95.525,86.344 96.921,86.344 97.839,85.425 Q1.3
HR_INT1: P1.5 U1.57 | length 10.7
  Top Layer w0.254: U1.57 111.058,76.933 111.667,76.933 113.665,74.935 113.665,74.041 117.342,70.364 P1.5
KEY: R7.2 R10.2 U6.34
LP_RX: J4.7 U1.8 | length 12.4
  Top Layer w0.254: U1.8 105.533,84.832 105.537,84.836 105.537,85.598 106.045,86.106 112.073,86.106 112.327,85.852 v1(112.395,85.852)
  Bottom Layer w0.254: v1(112.395,85.852) 112.395,87.864 J4.7
LP_TX: J4.6 U1.9 | length 11.1
  Top Layer w0.254: U1.9 105.033,85.856 105.837,86.66 v1(111.125,86.66)
  Bottom Layer w0.254: v1(111.125,86.66) 111.125,87.844 J4.6
Misc1: R8.1 U1.20 | length 5.3
  Top Layer w0.254: R8.1 95.237,81.013 95.441,80.81 95.58,80.81 97.432,78.958 U1.20
Misc2: R9.1 U1.21 | length 4.8
  Top Layer w0.254: R9.1 95.406,79.46 95.8,79.46 96.802,78.458 U1.21
Misc3: R12.1 U1.22 | length 4.3
  Top Layer w0.254: R12.1 95.344,77.958 U1.22
MISO_ACC: P5.3 U1.35 | length 14.7
  Top Layer w0.254: P5.3 93.384,67.984 100.654,67.984 102.533,69.863 U1.35
MISO_SCRN: U1.52
MOSI_ACC: P5.2 U1.36 | length 12.7
  Top Layer w0.254: P5.2 95.543,67.603 100.811,67.603 103.033,69.824 U1.36
MOSI_SCRN: J1.3 U1.53 | length 15.8
  Top Layer w0.254: J1.3 107.793,64.201 112.903,69.311 112.903,73.818 111.788,74.933 111.058,74.933 U1.53
NetD3_1: D3.1 R6.1 | length 1.4
  Bottom Layer w0.254: R6.1 D3.1
NetD4_1: D4.1 R8.2 | length 1.6
  Top Layer w0.254: D4.1 93.724,81.138 R8.2
NetD5_1: D5.1 R9.2 | length 1.6
  Top Layer w0.254: D5.1 93.737,79.627 R9.2
NetD6_1: D6.1 R12.2 | length 1.8
  Top Layer w0.254: D6.1 93.535,78.125 93.739,77.922 R12.2
NRST: C8.1 J4.1 U1.7 | length 7.6
  Top Layer w0.254: U1.7 106.033,83.866 C8.1@106.249,84.082 ; C8.1@106.222,84.082 106.226,84.078 106.93,84.078 v1(106.934,84.074)
  Bottom Layer w0.254: J4.1 104.648,87.617 104.648,85.769 106.299,84.118 106.89,84.118 v1(106.934,84.074)
Paired: R6.2 U6.32 | length 3
  Bottom Layer w0.254: U6.32 114.462,65.453 114.668,65.659 R6.2
PGOOD: D1.1 R1.2 | length 1.3
  Top Layer w0.254: R1.2 113.633,92.318 113.854,92.097 D1.1
RST_Screen: J1.7 U1.42 | length 9.8
  Top Layer w0.254: J1.7 103.072,62.78 103.072,65.48 106.033,68.441 U1.42
SCL: P1.3 R4.1 U1.58 | length 8.3
  Top Layer w0.254: U1.58 112.153,77.458 113.01,76.601 114.885,76.601 R4.1 116.235,76.551 117.342,75.444 P1.3
SCLK_ACC: P5.1 U1.34 | length 10.3
  Top Layer w0.254: v1(96.901,68.58) 100.711,68.58 102.008,69.877 102.008,70.933 U1.34
  Layer 1 w0.254: P5.1 95.885,67.564 v1(96.901,68.58)
SCLK_SCRN: J1.4 U1.51 | length 15.2
  Top Layer w0.254: J1.4 106.637,62.594 106.637,63.584 112.522,69.469 112.522,73.66 112.249,73.933 111.058,73.933 U1.51
SDA: P1.4 R3.1 U1.59 | length 13.9
  Top Layer w0.254: U1.59 112.573,77.958 113.061,77.47 114.3,77.47 114.487,77.657 114.512,77.657 114.935,78.08 R3.1 115.316,77.724 116.84,77.724 117.856,76.708 119.38,76.708 119.761,76.327 119.761,74.145 P1.4
SWCLK: J4.2 U1.49 | length 25.5
  Top Layer w0.254: v2(110.479,70.993) 110.573,70.993 110.948,71.368 111.246,71.368 111.887,72.009 111.887,72.771 111.725,72.933 111.058,72.933 U1.49
  Layer 1 w0.254: v1(107.05,85.206) 107.569,85.725 109.22,85.725 111.887,83.058 111.887,72.263 111.119,71.495 110.981,71.495 v2(110.479,70.993)
  Bottom Layer w0.254: J4.2 106.165,86.113 107.05,85.228 v1(107.05,85.206)
SWDIO: J4.3 U1.46 | length 20.3
  Top Layer w0.254: v2(107.823,69.469) 107.823,69.538 108.033,69.748 U1.46
  Layer 1 w0.254: v2(107.823,69.469) 107.886,69.532 107.886,85.026 v1(107.95,85.09)
  Bottom Layer w0.254: J4.3 107.415,85.625 v1(107.95,85.09)
SWO: U1.55
VBAT: C9.1 D2.2 R2.2 U2.1 U2.3 VBAT.1
VBAT_RAW: D2.1 J3.1
  other v1: 101.981,96.393 102.87,96.393 103.759,96.393
pads on no net: U1.5 U1.6 U1.10 U1.15 U1.16 U1.17 U1.23 U1.27 U1.28 U1.38 U1.39 U1.40 U1.45 U1.50 U1.54 U1.56 U1.61 U1.62 U2.4 U6.3 U6.4 U6.5 U6.6 U6.7 U6.8 U6.9 U6.10 U6.14 U6.15 U6.16 U6.17 U6.18 U6.19 U6.20 U6.23 U6.24 U6.25 U6.26 U6.27 U6.28 U6.29 U6.30 U6.33

## Polygon pours and split planes (outlines as drawn)
GND on Bottom Layer "GND_L04_P068" (solid, remove dead copper, pour order 68): 78.613,98.425 78.613,55.372 87.376,46.609 88.646,47.879 123.952,47.879 123.952,52.324 137.922,66.294 136.271,67.945 136.271,99.314 111.252,99.314 106.045,104.521
3.3V on Bottom Layer "3.3V_L04_P067" (solid, remove dead copper, pour order 67): 96.266,76.962 96.52,76.708 98.044,76.708 98.171,76.835 98.171,77.978 98.552,78.359 99.822,78.359 99.949,78.486 99.949,79.502 99.822,79.629 97.79,79.629 96.266,78.105
3.3V on Bottom Layer "3.3V_L04_P063" (solid, remove dead copper, pour order 63): 109.474,88.9 109.347,88.773 109.347,84.201 108.839,83.693 108.839,83.058 108.966,82.931 110.236,82.931 110.744,83.439 110.744,86.106 110.49,86.36 110.49,88.773 110.363,88.9
VBAT_RAW on Bottom Layer "VBAT_RAW_L04_P062" (solid, remove dead copper, pour order 62): 101.346,96.901 104.394,96.901 104.775,96.52 104.775,93.599 104.521,93.345 101.6,93.345 100.711,92.456 100.711,88.138 98.171,85.598 94.234,85.598 92.837,84.201 92.837,79.375 92.583,79.121 91.567,79.121 91.186,79.502 91.186,86.233 97.409,92.456 99.06,92.456 100.711,94.107 100.711,96.266
3.3V on Bottom Layer "3.3V_L04_P060" (solid, remove dead copper, pour order 60): 119.825,62.039 121.73,62.039 122.428,62.738 122.428,65.913 121.031,67.31 120.396,67.31 119.507,66.421 119.507,62.357
KEY on Bottom Layer "KEY_L04_P061" (solid, remove dead copper, pour order 61): 111.252,63.246 111.125,63.119 111.125,61.849 111.252,61.722 117.221,61.722 117.856,62.357 117.856,67.056 117.602,67.31 116.332,67.31 115.951,66.929 115.951,63.627 115.57,63.246
VBAT on Top Layer "VBAT_L01_P056" (solid, remove dead copper, pour order 56): 100.965,93.599 99.314,95.25 98.171,95.25 97.79,94.869 97.79,93.345 100.838,90.297 100.838,88.392 100.965,88.265 104.394,88.265 104.648,88.519 104.648,89.662 105.029,90.043 106.299,90.043 107.061,90.805 107.823,90.805 107.95,90.932 107.95,91.313 107.823,91.44 106.807,91.44 106.68,91.567 106.68,92.456 106.934,92.71 107.823,92.71 107.95,92.837 107.95,93.345 106.807,94.488 105.283,94.488 104.394,93.599
GND on Top Layer "GND_L01_P065" (solid, remove dead copper, pour order 65): 75.692,101.854 76.327,101.219 76.327,55.245 77.089,55.245 82.169,50.165 124.714,50.165 124.714,50.292 139.065,64.643 138.176,65.532 138.176,100.965
3.3V on Top Layer "3.3V_L01_P064" (solid, remove dead copper, pour order 64): 114.173,75.565 114.3,75.692 115.824,75.692 116.586,74.93 116.586,73.787 116.332,73.533 114.935,73.533 114.173,74.295
3.3V on Top Layer "t3.3V_L01_P064" (solid, remove dead copper, pour order 57): 109.982,64.516 109.728,64.262 109.728,61.722 109.855,61.595 110.744,61.595 110.871,61.722 110.871,64.262 110.617,64.516
3.3V on Top Layer "3.3V_L01_P055" (solid, remove dead copper, pour order 55): 110.109,80.264 109.982,80.137 109.601,80.137 109.474,80.264 109.474,80.772 109.601,80.899 110.109,80.899 110.236,80.772 111.379,80.772 112.649,82.042 115.57,82.042 115.951,81.661 115.951,79.248 115.57,78.867 114.3,78.867 114.173,78.994 114.173,80.01 113.919,80.264
3.3V on Top Layer "3.3V_L01_P048" (solid, remove dead copper, pour order 48): 100.38,79.679 98.629,79.679 98.425,79.883 98.425,80.264 98.298,80.391 97.536,80.391 97.409,80.264 97.409,79.502 97.663,79.248 100.33,79.248 100.457,79.121 100.965,79.121 101.092,79.248 101.092,79.756 100.965,79.883 100.584,79.883
3.3V on Top Layer "3.3V_L01_P051" (solid, remove dead copper, pour order 51): 100.711,71.882 101.092,72.263 101.092,72.898 100.838,73.152 98.933,73.152 98.679,72.898 97.917,72.898 97.79,72.771 97.79,72.009 97.917,71.882
3.3V on Top Layer "3.3V_L01_P049" (solid, remove dead copper, pour order 49): 108.712,72.009 108.839,71.882 108.839,70.358 109.22,69.977 109.22,69.088 109.347,68.961 110.109,68.961 110.236,69.088 110.236,69.977 109.347,70.866 109.347,71.501 109.474,71.628 109.474,72.39 109.347,72.517 108.839,72.517 108.712,72.39
3.3V on Top Layer "3.3V_L01_P050" (solid, remove dead copper, pour order 50): 108.839,83.693 108.839,81.788 108.966,81.661 109.347,81.661 110.49,82.804 110.49,83.693 110.363,83.82 108.966,83.82
3.3V on Top Layer "3.3V_L01_P052" (solid, remove dead copper, pour order 52): 109.474,93.345 109.347,93.218 109.347,92.837 110.49,91.694 113.03,91.694 113.157,91.821 113.157,92.964 113.919,93.726 113.919,94.234 113.538,94.615 112.649,94.615 112.268,94.234 112.268,93.472 112.141,93.345
3.3V on Top Layer "3.3V_L01_P053" (solid, remove dead copper, pour order 53): 102.805,81.734 102.805,81.088 102.743,81.026 102.743,80.391 102.87,80.264 103.505,80.264 103.632,80.391 103.632,80.899 103.251,81.28 103.251,83.185 103.505,83.439 103.759,83.439 104.14,83.82 104.14,87.757 103.886,88.011 102.616,88.011 102.489,87.884 102.489,83.566 102.812,83.243
VBAT_RAW on Top Layer "VBAT_RAW_L01_P054" (solid, remove dead copper, pour order 54): 100.965,96.52 100.965,93.98 101.092,93.853 104.394,93.853 104.521,93.98 104.521,96.52 104.267,96.774 101.219,96.774
3.3V on Layer 2 "3.3V_L03_P059" (solid, remove dead copper, pour order 59): 77.343,102.489 77.724,102.108 77.724,50.8 133.35,50.8 135.001,49.149 135.001,101.727
GND on Layer 1 "GND_L02_P058" (solid, remove dead copper, pour order 58): 77.978,99.695 81.026,96.647 81.026,48.387 103.251,48.387 110.617,41.021 120.777,51.181 151.765,51.181 151.765,86.106 135.509,102.362

## Keep-outs
Top Layer:
  rectangle: 83.919,39.847 127.127,61.437
Layer 1:
  rectangle: 83.919,39.72 127.127,61.31
Layer 2:
  rectangle: 84.046,39.593 127.254,61.183
Bottom Layer:
  rectangle: 83.975,39.809 127.183,61.399

## Silkscreen, mask and mechanical layers (free items; w line width, h text height)
Top Overlay:
  drawing of 11 lines, arcs and shapes, not listed
  text "PGOOD" at 113.182,89.433 h0.76
  text "+" at 96.773,86.27 h0.76 r315
  text "-" at 95.831,85.456 h0.76 r315
  text "Misc LEDs" at 88.798,82.321 h0.76
  text "3V3" at 116.942,80.289 h0.76 r90
  text "GND" at 116.942,77.368 h0.76 r90
  text "SCL" at 116.942,74.955 h0.76 r90
  text "Heart Rate" at 120.879,72.161 h0.76 r90
  text "SDA" at 116.942,71.526 h0.76 r90
  text "GND" at 93.701,71.399 h0.76 r90
  text "3V3" at 96.241,71.399 h0.76 r90
  text "INT1" at 91.161,71.018 h0.76 r90
  text "INT2" at 88.621,70.764 h0.76 r90
  text "INT" at 116.942,69.24 h0.76 r90
  text "CS" at 88.748,67.208 h0.76 r90
  text "MISO" at 91.288,67.208 h0.76 r90
  text "MOSI" at 93.828,67.208 h0.76 r90
  text "CLK" at 96.368,67.208 h0.76 r90
  text "Accelerometer" at 86.335,66.954 h0.76 r90
  text "BL" at 101.956,59.969 h0.76 r90
  text "DC" at 104.496,59.969 h0.76 r90
  text "CS" at 105.766,59.969 h0.76 r90
  text "RST" at 103.226,59.207 h0.76 r90
  text "CLK" at 106.909,59.207 h0.76 r90
  text "GND" at 109.449,59.207 h0.76 r90
  text "3V3" at 110.719,59.207 h0.76 r90
  text "MOSI" at 108.179,58.572 h0.76 r90
Bottom Overlay:
  lines w0.214: 87.376,61.468 123.19,61.468
  text "VBAT" at 97.765,93.497 h0.76
  text "Debug" at 100.432,89.814 h0.76
  text "TX" at 110.769,84.861 h0.76 r270
  text "GND" at 108.356,84.48 h0.76 r270
  text "3V3" at 109.499,84.48 h0.76 r270
  text "GND" at 113.309,84.353 h0.76 r270
  text "BOOT" at 123.927,84.099 h0.76
  text "GND" at 87.732,83.972 h0.76
  text "RX" at 112.039,83.972 h0.76 r270
  text "NRST" at 103.149,83.845 h0.76 r270
  text "SWDIO" at 105.689,83.337 h0.76 r270
  text "SWCLK" at 104.419,83.083 h0.76 r270
  text "GND" at 114.783,80.162 h0.76
  text "+" at 92.304,78.257 h0.76
  text "-" at 93.701,78.131 h0.76
  text "VBAT" at 94.082,77.114 h0.76
  text "3V3" at 86.462,75.971 h0.76
  text "Paired" at 117.196,71.399 h0.76
  text "KEY" at 123.038,63.906 h0.76
  text "RX" at 97.13,63.398 h0.76
  text "TX" at 97.13,62.001 h0.76
Top Outline:
  circle w0.254: c105.283,75.438 r22

## Text inside footprints (layer, text, board x,y; h text height)
U2: Top Overlay "*" at 106.76,93.329 h0.76; Mechanical 13 "*" at 107.731,92.236 h1.27